# Altium PCB STM32_test_board_pcb.PcbDoc
Units mm, origin at the board's own origin, x right, y up, seen from the top; angles counter-clockwise.
Board outline 100.9 x 50 mm, 2 copper layers (Top Layer, Bottom Layer); 41 components, 47 nets, 159 pads, 14 vias.
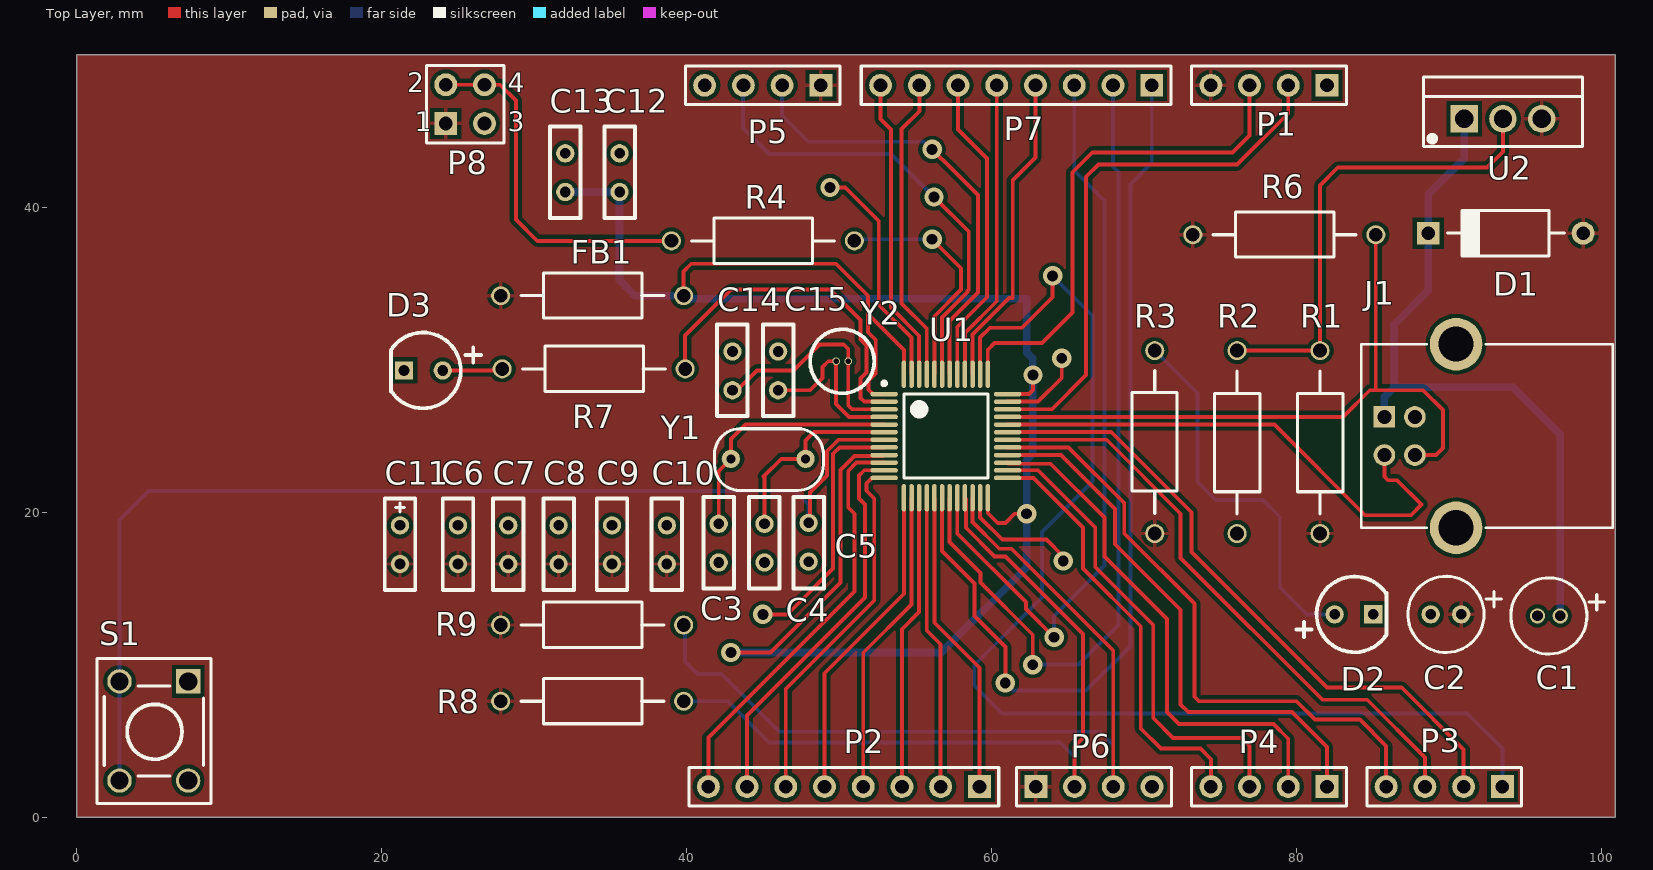
[diagram p0: Top Layer view]
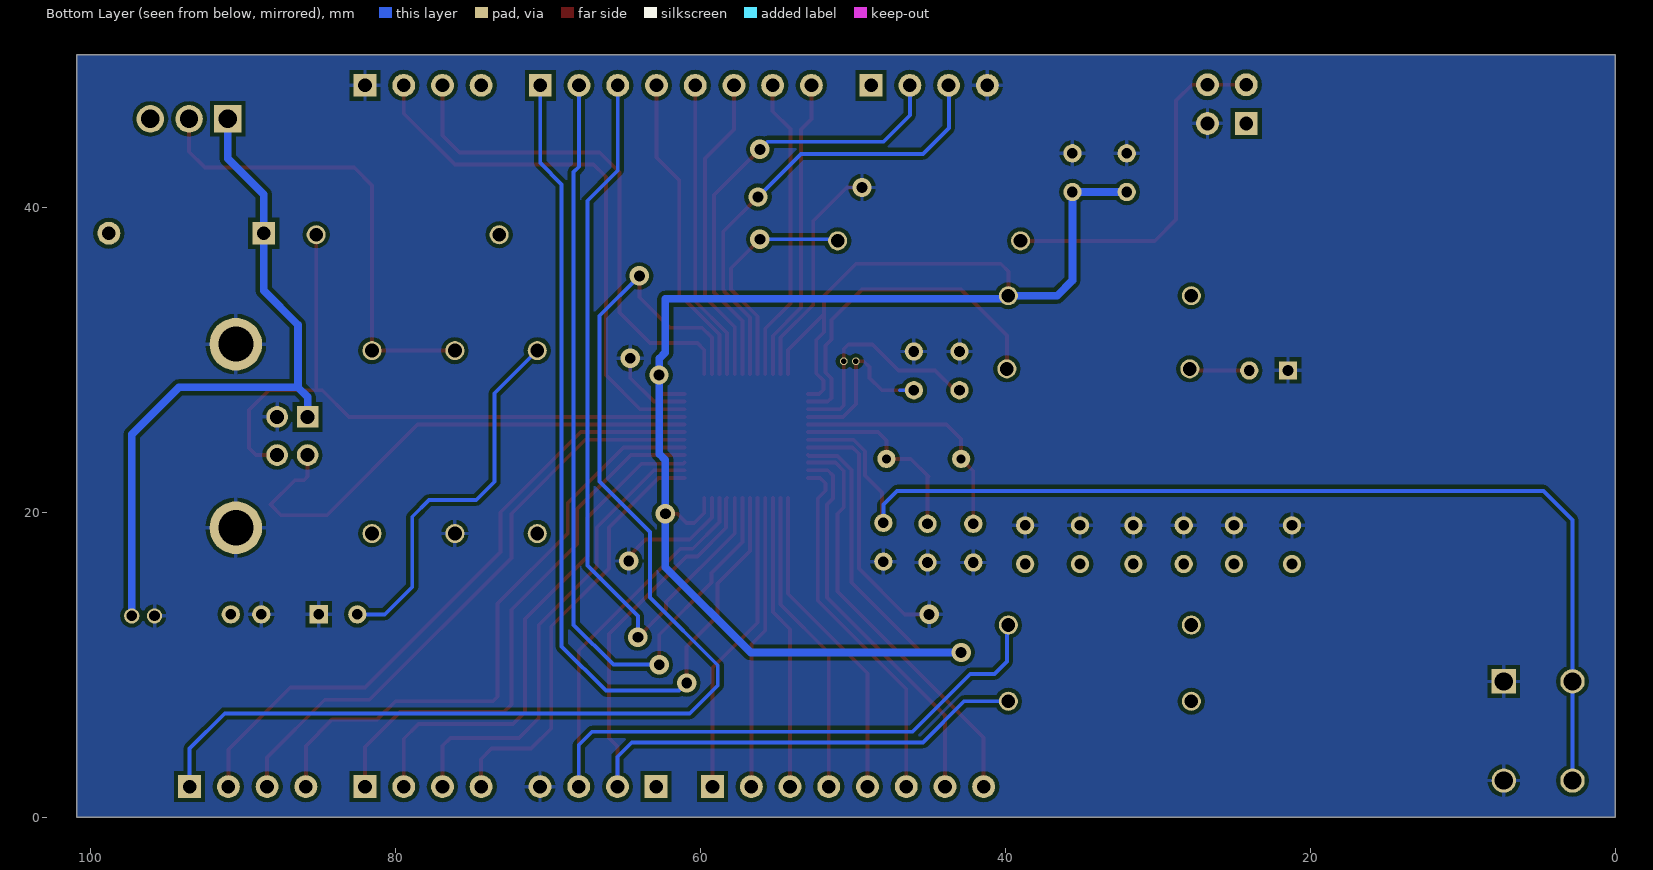
[diagram p1: Bottom Layer view, seen from below]

## Layer stack, top to bottom
Top Solder: solder mask 0.0102, Solder Resist, Dk 3.5
Top Layer: signal copper 0.0356
Dielectric 1: dielectric 0.32, FR-4, Dk 4.8
Bottom Layer: signal copper 0.0356
Bottom Solder: solder mask 0.0102, Solder Resist, Dk 3.5

## Board outline
0,0 100.9,0 100.9,50 0,50

## Design rules (kind name [scope] priority, off if disabled: settings)
Clearance [All] p1: gap=0.254 except(0.154: Track-Track Track-SMDPad SMDPad-SMDPad)
PolygonConnect [All] p1: connectstyle=Relief reliefconductorwidth=0.254 reliefentries=4 polygonreliefangle="90 Angle" airgapwidth=0.254
RoomDefinition STM32_test_board_schematic [InComponentClass('STM32_test_board_schematic')] p1: confinementstyle=ConfineIn formatcopy=TRUE lockcomponents=FALSE outline -349.3,-106.8 172.3,-106.8 172.3,115.9 -349.3,115.9
RoutingVias [All] p1: holewidth=0.711 width=1.27 viastyle="Through Hole" minholewidth=0.711 minwidth=1.27 maxholewidth=0.711 maxwidth=1.27
SolderMaskExpansion [All] p1: expansion=0.102
Width [All] p1: maxlimit=0.508 minlimit=0.254 preferedwidth=0.254 toplayer_maxwidth=0.254 minimp=50.000000 maximp=50.000000 favimp=50.000000
30 further rules are at their usual default settings.

## Components (designator, comment, footprint, x,y, rotation, side; value= is the part's Value field where it differs from the comment)
C1 "0.1uF" Electrolytic_Cap_1_5mm 95.8,13.2 r0 top
C2 "1uF" Electrolytic_CAP_2mm 88.8,13.3 r0 top
C3 "22pF" THT_CEREMIC_CAP_254 42.1,16.7 r90 top
C4 "22pF" THT_CEREMIC_CAP_254 45.1,16.7 r90 top
C5 "100nF" THT_CEREMIC_CAP_254 48,19.3 r270 top
C6 "100nF" THT_CEREMIC_CAP_254 25,16.6 r90 top
C7 "100nF" THT_CEREMIC_CAP_254 28.3,16.6 r90 top
C8 "100nF" THT_CEREMIC_CAP_254 31.6,16.6 r90 top
C9 "100nF" THT_CEREMIC_CAP_254 35.1,16.6 r90 top
C10 "100nF" THT_CEREMIC_CAP_254 38.7,16.6 r90 top
C11 "4.7uF" THT_Tantal_Cap_254 21.2,16.6 r90 top
C12 "1uF" THT_CEREMIC_CAP_254 35.6,41 r90 top
C13 "10nF" THT_CEREMIC_CAP_254 32.039,41 r90 top
C14 "15pF" THT_CEREMIC_CAP_254 43,28 r90 top
C15 "15pF" THT_CEREMIC_CAP_254 46,28 r90 top
D1 "1N4002" DO-35 98.8,38.3 r180 top
D2 "LED" LED 82.5,13.3 r0 top
D3 "LED" LED 24,29.3 r180 top
FB1 "FerriteBead" AxialMetalFilmResistors 39.8,34.2 r180 top
J1 "USB 2.0 Type B" USB2_0_B_DIP 92.5,25 r90 top
P1 "Header 4" HDR1X4 82,48 r180 top
P2 "Header 8" HDR1X8 59.2,2 r180 top
P3 "Header 4" HDR1X4 93.5,2 r180 top
P4 "Header 4" HDR1X4 82,2 r180 top
P5 "Header 4" HDR1X4 48.8,48 r180 top
P6 "Header 4" HDR1X4 62.9,2 r0 top
P7 "Header 8" HDR1X8 70.5,48 r180 top
P8 "Header 2X2" HDR2X2 24.2,45.5 r0 top
R1 "Resistor" AxialMetalFilmResistors 81.54,18.6 r90 top
R2 "Resistor" AxialMetalFilmResistors 76.1,18.6 r90 top
R3 "Resistor" AxialMetalFilmResistors 70.7,30.6 r270 top
R4 "Resistor" AxialMetalFilmResistors 51,37.8 r180 top
R6 "Resistor" AxialMetalFilmResistors 85.2,38.2 r180 top
R7 "Resistor" AxialMetalFilmResistors 39.9,29.4 r180 top
R8 "Resistor" AxialMetalFilmResistors 39.8,7.6 r180 top
R9 "Resistor" AxialMetalFilmResistors 39.8,12.6 r180 top
S1 "PushButton" PushButton 7.3,8.9 r0 top
U1 "STM32F103C8T6" LQFP48_N 57,25 r0 top
U2 "LM317" TO220-3 91,45.8 r0 top
Y1 "8MHz" OSC 42.9,23.5 r0 top
Y2 "32.768kHz" OSC_Round 49.8,29.9 r0 top

## Footprints (in the part's own frame and the unit in brackets; to place one, negate y for a bottom-side part, rotate by r counter-clockwise, add the part's x,y. Pads: shape width x height; smd on the part's side, far side on the other; paste and mask are expansions set on the pad)
AxialMetalFilmResistors [mm]
  round 1.25 hole 0.9: 1(0,0) 2(12,0)
  silkscreen extent 1.3,-1.5 10.67,1.47, body extent -0.18,-1.31 12.12,1.31, height 2.62
DO-35 [mm]
  round 1.5 hole 0.9: 1(0,0)
  rect 1.5x1.5 hole 0.9: 2(10.16,0)
  silkscreen extent 1.24,-1.5 8.9,1.5
Electrolytic_Cap_1_5mm [mm]
  round 1 hole 0.7: 1(0,0) 2(1.5,0)
  silkscreen extent -1.75,-2.5 4.4,2.5
Electrolytic_CAP_2mm [mm]
  round 1.2 hole 0.7: 1(0,0) 2(2,0)
  silkscreen extent -1.5,-2.5 4.65,2.5
HDR1X4 [mm] "Connector; Header; 4 Position"
  rect 1.5x1.5 hole 0.9: 1(0,0)
  round 1.5 hole 0.9: 2(2.54,0) 3(5.08,0) 4(7.62,0)
  silkscreen extent -1.27,-1.27 8.89,1.27, body extent -1.27,-1.27 8.89,1.27, height 7.58
HDR1X8 [mm] "Connector; Header; 8 Position"
  rect 1.5x1.5 hole 0.9: 1(0,0)
  round 1.5 hole 0.9: 2(2.54,0) 3(5.08,0) 4(7.62,0) 5(10.16,0) 6(12.7,0) 7(15.24,0) 8(17.78,0)
  silkscreen extent -1.27,-1.27 19.05,1.27, body extent -1.27,-1.27 19.05,1.27, height 7.58
HDR2X2 [mm] "Connector; Header; 2x2 Position"
  rect 1.5x1.5 hole 0.9: 1(0,0)
  round 1.5 hole 0.9: 2(0,2.54) 3(2.54,0) 4(2.54,2.54)
  silkscreen extent -1.27,-1.27 3.81,3.81, body extent -1.27,-1.27 3.81,3.81, height 7.58
LED [mm]
  round 1.2 hole 0.7: 1(0,0)
  rect 1.2x1.2 hole 0.7: 2(2.54,0)
  silkscreen extent -2.5,-2.48 3.41,2.48, body extent -1.25,-2.75 3.95,2.75, height 11.5
LQFP48_N [mm] "Thin QFP, 48-Leads, Body 7x7mm, Pitch 0.5mm, IPC Medium Density"
  oval 1.8x0.3 smd: 1(-4.05,2.75) 2(-4.05,2.25) 3(-4.05,1.75) 4(-4.05,1.25) 5(-4.05,0.75) 6(-4.05,0.25) 7(-4.05,-0.25) 8(-4.05,-0.75) 9(-4.05,-1.25) 10(-4.05,-1.75) 11(-4.05,-2.25) 12(-4.05,-2.75) 25(4.05,-2.75) 26(4.05,-2.25) 27(4.05,-1.75) 28(4.05,-1.25) 29(4.05,-0.75) 30(4.05,-0.25) 31(4.05,0.25) 32(4.05,0.75) 33(4.05,1.25) 34(4.05,1.75) 35(4.05,2.25) 36(4.05,2.75)
  oval 0.3x1.8 smd: 13(-2.75,-4.05) 14(-2.25,-4.05) 15(-1.75,-4.05) 16(-1.25,-4.05) 17(-0.75,-4.05) 18(-0.25,-4.05) 19(0.25,-4.05) 20(0.75,-4.05) 21(1.25,-4.05) 22(1.75,-4.05) 23(2.25,-4.05) 24(2.75,-4.05) 37(2.75,4.05) 38(2.25,4.05) 39(1.75,4.05) 40(1.25,4.05) 41(0.75,4.05) 42(0.25,4.05) 43(-0.25,4.05) 44(-0.75,4.05) 45(-1.25,4.05) 46(-1.75,4.05) 47(-2.25,4.05) 48(-2.75,4.05)
  silkscreen extent -4.17,-2.75 2.75,3.57, body extent -3.5,-3.5 3.5,3.5, height 1.6
OSC [mm]
  round 1.2 hole 0.6: 1(0,0) 2(4.9,0)
  silkscreen extent -1.07,-2.07 6.07,1.97, body extent -3.25,-2.5 8.25,2.5, height 5
OSC_Round [mm]
  round 0.5 hole 0.35: 1(0,0) 2(0.8,0)
  silkscreen extent -1.7,-2.1 2.5,2.1, body extent -0.5,-0.9 1.3,0.9, height 2.89
PushButton [mm]
  rect 1.6x1.6 hole 1.2: 1(0,0)
  round 1.6 hole 1.2: 2(0,-6.5) 3(-4.5,0) 4(-4.5,-6.5)
  silkscreen extent -5.97,-8 1.5,1.5, body extent -5.3,-7.08 0.71,0.48, height 7
THT_CEREMIC_CAP_254 [mm]
  round 1.2 hole 0.7: 1(0,0) 2(2.54,0)
  silkscreen extent -1.7,-1 4.3,1, body extent -1.05,-1.25 3.65,1.25, height 10.35
THT_Tantal_Cap_254 [mm]
  round 1.2 hole 0.7: 1(0,0) 2(2.54,0)
  silkscreen extent -1.7,-1 4.3,1, body extent -0.83,-1.96 3.23,2.1, height 8.6
TO220-3 [mm]
  rect 1.8x1.8 hole 1.2: 1(0,0)
  round 1.8 hole 1.2: 2(2.54,0) 3(5.08,0)
  silkscreen extent -2.67,-1.82 7.75,2.75, body extent -2.74,-1.85 7.8,2.85, height 23.56
USB2_0_B_DIP [mm] "USB 2.0 Type B Horizontal"
  rect 1.42x1.42 hole 0.92: 1(1.25,6.74)
  round 1.42 hole 0.92: 2(-1.25,6.74) 3(-1.25,4.74) 4(1.25,4.74)
  round 3.45 hole 2.3: S(-6.02,2.03) S(6.02,2.03)
  silkscreen extent -6.02,-8.25 6.02,8.25, body extent -7.48,-8.25 7.48,8.25, height 11.1

## Part data
C1: library part THT_Electrolytic_Cap, "1.5mm Electrolytic"
C2: library part THT_Electrolytic_Cap_2, "2mm Electrolytic"
C3 C4 C5 C6 C7 C8 C9 C10 C12 C13 C14 C15: library part THT_Ceramic_Cap
C11: library part THT_Tantal_Cap
D1: "Diode Standard 100V 1A Through Hole DO-41"
FB1: library part Resistor, "Resistor"
J1: library part USB2_0-A&B, "USB 2.0 Type A and Type B"
P1 P3 P4 P5 P6: "Header, 4-Pin"
P2 P7: "Header, 8-Pin"
P8: "Header, 2-Pin, Dual row"
U1: "STM32 ARM-based 32-bit MCU with 64 Kbytes Flash, 48-pin LQFP, Industrial Temperature"
U2: "Linear Voltage Regulator IC Variable Output TO-220-3"
Y1: library part OSC
Y2: library part OSC_round

## Via types
v1: diameter 1.27, hole 0.711, Top Layer to Bottom Layer, 14 vias

## Nets (pads, with @x,y where several pads share a name; then routed paths per layer and width w, separated by ;. In a path a pad name is that pad's centre, name@x,y a point inside that pad or via, vN(x,y) a via of type N, cw(c..) or ccw(c..) an arc to the next point about the centre after c; other vN are vias at no path point)
3V3: C2.2 C6.1 C7.1 C8.1 C9.1 C10.1 C11.1 D1.1 FB1.2 P1.4 P5.1 P6.1 P8.1 R1.1 R3.2 R6.2 R8.2 R9.2 U2.3
ADJ: R1.2 R2.2 U2.2 | length 31.4
  Top Layer w0.254: R2.2 R1.2 81.54,41.44 82.7,42.6 92.5,42.6 93.54,43.64 U2.2
ALIVELED: D3.1 R7.2 | length 3.9
  Top Layer w0.254: D3.1 27.8,29.3 R7.2
BOOT0: R4.1 U1.44 | length 15.5
  Top Layer w0.254: v1@56,37.9 v1(56.1,37.9) 58,36 58,34.6 56.25,32.85 U1.44
  Bottom Layer w0.254: R4.1@51.1,37.9 v1(56.1,37.9)
GND: C1.1 C2.1 C3.1 C4.1 C5.2 C6.2 C7.2 C8.2 C9.2 C10.2 C11.2 C12.2 C13.2 C14.2 C15.2 D2.2 D3.2 J1.4 J1.S P1.1 P5.4 P6.4 P8.3 R2.1 S1.1 S1.2 U1.8 U1.23 U1.35 U1.47 | length 45.5
  Top Layer w0.254: v1(45,13.3) 46.6,13.3 49.608,16.308 49.608,23.831 50.027,24.25 U1.8 ; v1(49.4,41.3) 50.4,41.3 52.6,39.1 52.6,33.6 54.75,31.45 U1.47 ; U1.23 59.25,19.65 60.7,18.2 63.6,18.2 64.7,17.1 v1(64.7,16.8) ; U1.35 63.05,27.25 64.6,28.8 v1(64.6,30.1)
HSE_IN: C3.2 U1.5 Y1.1 | length 16.3
  Top Layer w0.254: C3.2 42.1,22.7 Y1.1 42.9,24.8 43.85,25.75 U1.5
HSE_OUT: C4.2 U1.6 Y1.2 | length 12.9
  Top Layer w0.254: 45.05,22.35 46.2,23.5 Y1.2 47.8,24.7 48.35,25.25 U1.6 ; C4.2 45.1,22.3
I2C_2_A: P6.2 R8.1 U1.21 | length 51.9
  Top Layer w0.254: U1.21 58.319,20.881 58.319,18.981 60.2,17.1 60.9,17.1 66,12 66,5.2 65.44,4.64 P6.2
  Bottom Layer w0.254: R8.1 42.7,7.6 45.4,4.9 64.5,4.9 65.44,3.96 P6.2
I2C_2_B: P6.3 R9.1 U1.22 | length 58.8
  Top Layer w0.254: U1.22 58.75,19.35 60.5,17.6 61.3,17.6 67.98,10.92 P6.3
  Bottom Layer w0.254: R9.1 39.9,12.5 39.9,10.2 40.7,9.4 42.3,9.4 46.1,5.6 67.1,5.6 67.98,4.72 P6.3
NetC14_1: C14.1 U1.3 Y2.2 | length 15.1
  Top Layer w0.254: C14.1 43.3,28 44.6,29.3 47,29.3 48.7,31 50.3,31 50.6,30.7 Y2.2 50.6,27 50.85,26.75 U1.3
NetC15_1: C15.1 U1.4 Y2.1 | length 12.2
  Top Layer w0.254: C15.1 48.1,28 48.9,28.8 48.9,29.514 49.286,29.9 Y2.1 49.8,27.1 50.65,26.25 U1.4
  Bottom Layer w0.254: C15.1 46.9,28
NetP8_2: P8.2 P8.4 R4.2 | length 23.6
  Top Layer w0.254: P8.2 P8.4 27.76,48.04 28.8,47 28.8,39.2 30.2,37.8 R4.2
NRST: C5.1 S1.3 S1.4 U1.7 | length 73.9
  Top Layer w0.254: C5.1 48.1,19.4 48.1,21.3 49.2,22.4 49.2,24 49.95,24.75 U1.7
  Bottom Layer w0.254: S1.4 S1.3 2.8,19.5 4.7,21.4 47.1,21.4 48,20.5 C5.1
PA0: P2.8 U1.10 | length 27.4
  Top Layer w0.254: P2.8 41.42,5.22 51,14.8 51,19.9 50.6,20.3 50.6,22.7 51.15,23.25 U1.10
PA1: P2.7 U1.11 | length 25.6
  Top Layer w0.254: P2.7 43.96,6.66 51.7,14.4 51.7,20.5 51.3,20.9 51.3,22.4 51.65,22.75 U1.11
PA2: P2.6 U1.12 | length 23.8
  Top Layer w0.254: P2.6 46.5,8.4 52.3,14.2 52.3,20.908 51.8,21.408 51.8,21.9 52.15,22.25 U1.12
PA3: P2.5 U1.13 | length 21.1
  Top Layer w0.254: P2.5 49.04,9.44 54.25,14.65 U1.13
PA4: P2.4 U1.14 | length 20.3
  Top Layer w0.254: P2.4 51.58,10.78 54.75,13.95 U1.14
PA5: P2.3 U1.15 | length 19.4
  Top Layer w0.254: P2.3 54.12,12.32 55.25,13.45 U1.15
PA6: P2.2 U1.16 | length 19.3
  Top Layer w0.254: U1.16 55.75,12.25 56.66,11.34 P2.2
PA7: P2.1 U1.17 | length 20.2
  Top Layer w0.254: U1.17 56.25,12.75 59.2,9.8 P2.1
PA8: P3.4 U1.29 | length 40.4
  Top Layer w0.254: U1.29 65.05,24.25 68.7,20.6 68.7,18.6 73.3,14 73.3,7.9 73.6,7.6 80,7.6 81.2,6.4 84.151,6.4 85.88,4.671 P3.4
PA9: P3.3 U1.30 | length 39.6
  Top Layer w0.254: U1.30 67.55,24.75 72.4,19.9 72.4,17 81.7,7.7 84.64,7.7 88.42,3.92 P3.3
PA10: P3.2 U1.31 | length 42.5
  Top Layer w0.254: U1.31 67.85,25.25 73.1,20 73.1,17.4 82,8.5 86.9,8.5 90.96,4.44 P3.2
PA15: P3.1 U1.38 | length 79.7
  Top Layer w0.254: U1.38 59.25,31.45 59.9,32.1 62,32.1 64,34.1 v1(64,35.5)
  Bottom Layer w0.254: v1(64,35.5) 66.612,32.888 66.612,22.012 63.3,18.7 63.3,14.4 58.863,9.963 58.863,8.637 60.7,6.8 91.2,6.8 93.5,4.5 P3.1
PB0: P7.1 U1.18 | length 60.9
  Top Layer w0.254: U1.18 56.75,17.45 58.876,15.324 58.876,13.187 60.9,11.163 v1(60.9,8.8)
  Bottom Layer w0.254: v1(60.9,8.8) 61.4,8.3 66.2,8.3 69.1,11.2 69.1,41.5 70.5,42.9 P7.1
PB1: P7.2 U1.19 | length 55.4
  Top Layer w0.254: U1.19 57.25,18.05 59.284,16.016 59.284,15.379 62.7,11.963 v1(62.7,10)
  Bottom Layer w0.254: v1(62.7,10) 65.7,10 68.312,12.612 68.312,42.308 67.96,42.66 P7.2
PB2: P7.3 U1.20 | length 50.2
  Top Layer w0.254: U1.20 57.75,18.601 62.251,14.1 62.251,13.649 v1(64.1,11.8)
  Bottom Layer w0.254: v1(64.1,11.8) 64.1,13.2 67.412,16.512 67.412,40.428 65.42,42.42 P7.3
PB3: P7.4 U1.39 | length 20.8
  Top Layer w0.254: U1.39 58.75,31.65 61.142,34.042 61.383,34.042 61.383,41.76 62.88,43.257 P7.4
PB4: P7.5 U1.40 | length 19.8
  Top Layer w0.254: U1.40 58.25,31.75 60.34,33.84 P7.5
PB5: P7.6 U1.41 | length 20.5
  Top Layer w0.254: U1.41 57.75,32.15 59.7,34.1 59.7,43.2 57.8,45.1 P7.6
PB6: P5.2 U1.42 | length 29.5
  Top Layer w0.254: v1(56.1,43.8) 57.4,42.5 59.1,40.8 59.1,34.4 57.25,32.55 U1.42
  Bottom Layer w0.254: P5.2 46.26,46.04 48,44.3 55.6,44.3 v1(56.1,43.8)
PB7: P5.3 U1.43 | length 30.5
  Top Layer w0.254: v1(56.225,40.675) 58.5,38.4 58.5,34.6 58.408,34.508 58.408,34.431 56.75,32.773 U1.43
  Bottom Layer w0.254: P5.3 43.7,47.98 43.7,45.2 45.4,43.5 53.4,43.5 v1(56.225,40.675)
PB8: P7.7 U1.45 | length 20.1
  Top Layer w0.254: P7.7 55.26,46.3 54.1,45.14 54.1,33.7 55.75,32.05 U1.45
PB9: P7.8 U1.46 | length 20
  Top Layer w0.254: P7.8 52.72,45.78 53.4,45.1 53.4,33.423 55.25,31.573 U1.46
PC13: R7.1 U1.2 | length 22.9
  Top Layer w0.254: R7.1 39.9,31.6 42.9,34.6 49.4,34.6 51.4,32.6 51.4,31.325 51.8,30.925 51.8,29.175 51.4,28.775 51.4,27.5 51.65,27.25 U1.2
POWERLED: D2.1 R3.1 | length 25.1
  Bottom Layer w0.254: R3.1 73.5,27.8 73.5,22 74.7,20.8 77.8,20.8 78.9,19.7 78.9,15.1 80.7,13.3 D2.1
SPI_1_A: P4.4 U1.25 | length 28.3
  Top Layer w0.254: U1.25 62.75,22.25 66,19 66,16.3 69.78,12.52 69.78,5.82 71.1,4.5 73.7,4.5 74.4,3.8 74.4,2.02 P4.4
SPI_1_B: P4.3 U1.26 | length 31.1
  Top Layer w0.254: U1.26 63.05,22.75 66.8,19 66.8,16.4 70.6,12.6 70.6,6.5 71.9,5.2 76.4,5.2 76.92,4.68 P4.3
SPI_1_C: P4.2 U1.27 | length 34.1
  Top Layer w0.254: U1.27 61.119,23.181 63.87,23.181 67.4,19.651 67.4,17.1 71.5,13 71.5,6.9 72.3,6.1 78.5,6.1 79.46,5.14 P4.2
SPI_1_D: P4.1 U1.28 | length 36.5
  Top Layer w0.254: U1.28 64.55,23.75 68.1,20.2 68.1,17.9 72.4,13.6 72.4,7.4 72.9,6.9 79.7,6.9 82,4.6 P4.1
SWDCLK: P1.3 U1.37 | length 33.3
  Top Layer w0.254: U1.37 59.75,30.65 60.2,31.1 63.3,31.1 65.3,33.1 65.3,42.3 66.6,43.6 75.8,43.6 76.92,44.72 P1.3
SWDIO: P1.2 U1.34 | length 35.9
  Top Layer w0.254: U1.34 63.95,26.75 66.2,29 66.2,42 67,42.8 76.1,42.8 79.46,46.16 P1.2
USB_D+: J1.3 R6.1 U1.33 | length 44.5
  Top Layer w0.254: U1.33 83.05,26.25 84.8,28 85.2,28 ; R6.1 85.2,28 ; J1.3 89.15,23.75 89.6,24.2 89.6,26.7 88.3,28 85.2,28
USB_D-: J1.2 U1.32 | length 34.5
  Top Layer w0.254: U1.32 78.55,25.75 84.5,19.8 87.5,19.8 88.2,20.5 86.6,22.1 86,22.1 85.76,22.34 J1.2
VBAT: C12.1 C13.1 FB1.1 U1.1 U1.9 U1.24 U1.36 U1.48 | length 130.2
  Top Layer w0.254: FB1.1 39.8,35.8 40.3,36.3 49.8,36.3 51.9,34.2 51.9,33 ; v1(42.9,10.8) 45.5,10.8 50.1,15.4 50.1,22.777 51.004,23.681 52.881,23.681 U1.9 ; U1.1 52.211,27.75 51.927,28.034 51.927,28.627 52.4,29.1 52.4,31.3 51.9,31.8 51.9,33 ; U1.48 54.25,30.65 51.9,33 ; U1.24 59.75,19.95 60.4,19.3 60.9,19.3 61.5,19.9 v1(62.3,19.9) ; U1.36 62.45,27.75 62.712,28.012 v1(62.712,29)
  Bottom Layer w0.254: FB1.1 FB1.1@40,34
  Bottom Layer w0.508: C13.1 C12.1 35.6,35.2 36.6,34.2 FB1.1 ; FB1.1@40,34 62.3,34 62.3,30.475 62.7,30.075 62.7,23.825 62.3,23.425 v1(62.3,19.9) 62.3,16.4 56.7,10.8 v1(42.9,10.8)
VBUS: C1.2 D1.2 J1.1 U2.1 | length 45.8
  Bottom Layer w0.508: J1.1 85.76,27.56 86.4,28.2 ; U2.1 91,43.2 88.64,40.84 D1.2 88.64,34.54 86.4,32.3 86.4,28.2 ; C1.2 97.3,25.1 94.2,28.2 86.4,28.2

## Polygon pours and split planes (outlines as drawn)
3V3 on Top Layer "Top Overlay-No Net" (solid, remove dead copper, pour order 0): 0,0 100.9,0 101.1,-0.2 100.9,0 100.9,50 0,50
GND on Bottom Layer "Top Overlay-No Net" (solid, remove dead copper, pour order 2): 0,50 100.9,50 100.9,0 0,0

## Silkscreen, mask and mechanical layers (free items; w line width, h text height)
Mechanical 1:
  lines w0.254: 0,0 101,0 101,50 0,50 0,0

## Text inside footprints (layer, text, board x,y; h text height)
P8: Top Overlay "3" at 28.264,44.992 h1.27; Top Overlay "4" at 28.264,47.532 h1.27; Top Overlay "2" at 21.66,47.532 h1.27; Top Overlay "1" at 22.168,44.992 h1.27
U2: Mechanical 31 "1" at 89.2,44.65 h1